# EAGLE board chipchestra-v04 (EAGLE 8.0.0)
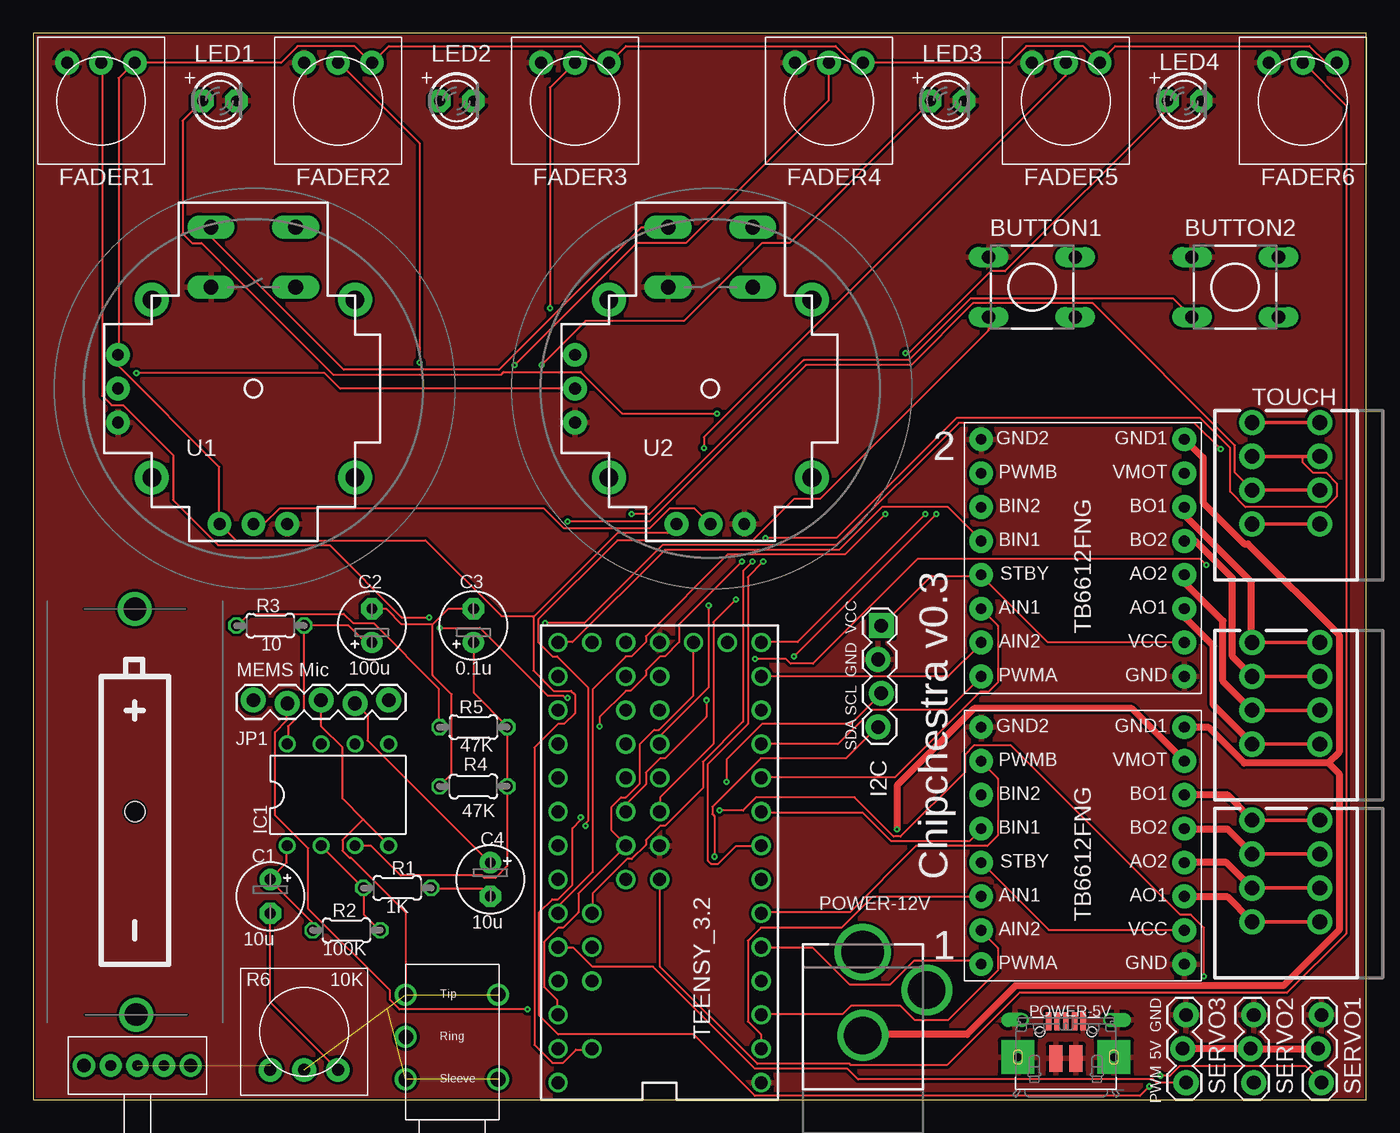
[diagram p0: board, top side]
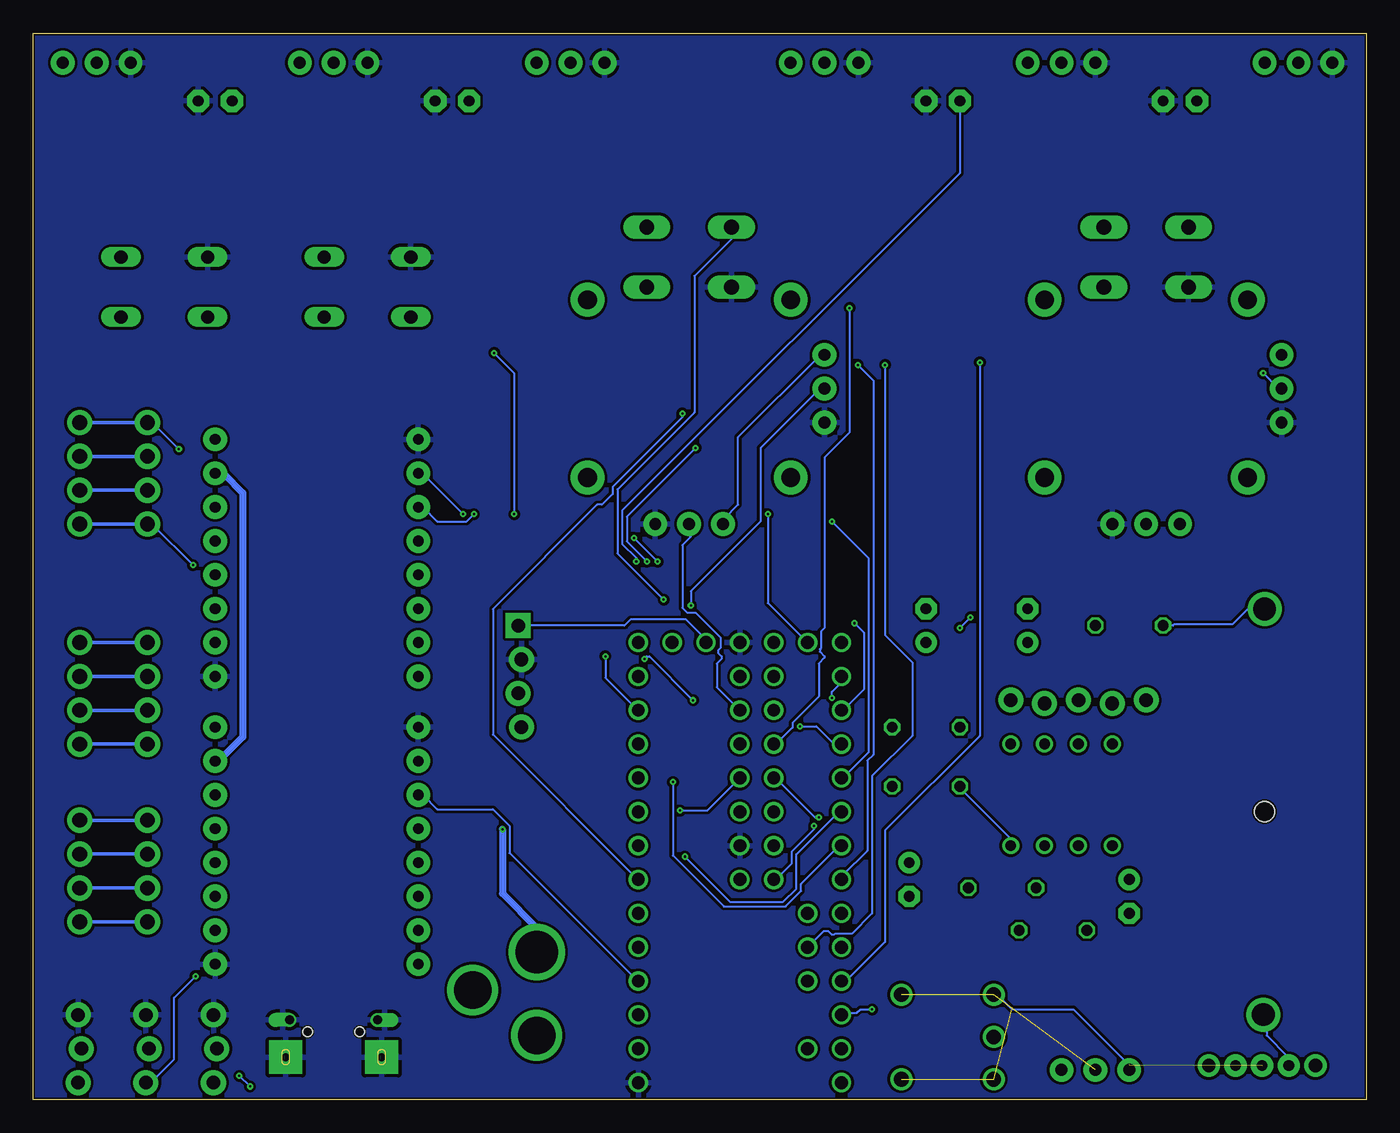
[diagram p1: board, bottom side, seen from below]

Size 100 x 80 mm. Coordinates in mm from the lower left corner, seen from the top.
Outline: 0,0 100,0 100,80 0,80 0,0
Copper layers (1*16): Top 0.035mm / dielectric 1.5mm / Bottom 0.035mm
Design rules "default *": minimum track width 6mil, minimum drill 6mil, track to track 8mil, track to pad 8mil, pad to pad 8mil, via to via 8mil, smd to smd 8mil, copper to edge 6mil, drill to drill 6mil, minimum pad ring 6mil, minimum via ring 6mil, stop-mask expansion 4mil, vias tented up to drill 0mil, thermal gap 10mil
Net classes: 0 default: width 0.152 mm, clearance 0.152 mm; 1 GND: width 0.508 mm, clearance 0.152 mm; 2 Power: width 0.508 mm, clearance 0.152 mm

## Footprints (pad centres in the part's own frame; a part is rotated, then mirrored left to right if it is on the bottom)
BATTERY-A23 = drill 1.702: GND@1 15.22,0.1; PWR@1 -15.22,0 | hole 1.524: 0,0
DTS-6 = drill 1 long: 1 -3.25,2.25; 2 3.25,2.25; 3 -3.25,-2.25; 4 3.25,-2.25
E2,5-5 = drill 0.813 pad 1.6: + -1.27,0 | drill 0.813 pad 1.6 octagon: - 1.27,0
TRIM-3386 = drill 0.9 pad 1.778: 1 -2.54,-2.857; 2 0,-2.857; 3 2.54,-2.857
1X04_LOCK = drill 1.016 pad 1.88 square: 1 0,0.127 | drill 1.016 pad 1.88: 2 2.54,-0.127; 3 5.08,0.127; 4 7.62,-0.127
DIL08 = drill 0.813 pad 1.27: 1 -3.81,-3.81; 2 -1.27,-3.81; 3 1.27,-3.81; 4 3.81,-3.81; 5 3.81,3.81; 6 1.27,3.81; 7 -1.27,3.81; 8 -3.81,3.81
1X05_LOCK = drill 1.016 pad 1.88: 1 0,0.127; 2 2.54,-0.127; 3 5.08,0.127; 4 7.62,-0.127; 5 10.16,0.127
LED3MM = drill 0.813 pad 1.676 octagon: A -1.27,0; K 1.27,0
SPRINGTERMINAL-2.54MM-4 = drill 1.1 pad 1.9: 1 7.62,-2.54; 2 5.08,-2.54; 3 2.54,-2.54; 4 0,-2.54; P$1 7.62,2.54; P$2 5.08,2.54; P$3 2.54,2.54; P$4 0,2.54
SPDT-SWITCH = drill 0.8 pad 1.676: 1 2,0; 2 4,0; 3 6,0 | drill 1 pad 1.676: P$1 0,0; P$2 8,0
4UCONN_20329 = smd 1 x 2: BASE@1 -0.75,-2; BASE@2 0.75,-2 | smd 0.4 x 1.35: D+ 0,0.775; D- -0.65,0.775; GND 1.3,0.775; ID 0.65,0.775; VBUS -1.3,0.775 | drill 0.7 offset: SPRT@1 -3.3,0.9; SPRT@2 3.3,0.9 | drill 0.6 pad 2.5 square: SPRT@3 -3.6,-1.9; SPRT@4 3.6,-1.9 | hole 0.7: -1.95,0; 1.95,0
DCJACK_2MM_PTH = drill 2.8: GND 0,7.35; GNDBREAK 4.8,10.75 | drill 3.2: PWR 0,13.6
0204/5 = drill 0.813 octagon: 1 -2.54,0; 2 2.54,0
1X03_LOCK = drill 1.016 pad 1.88: 1 0,0.127; 2 2.54,-0.127; 3 5.08,0.127
TEENSY_3.0-3.2_ALL_PINS_&_PADS = drill 0.965: 0 -7.62,13.97; 1 -7.62,11.43; 2 -7.62,8.89; 3 -7.62,6.35; 3.3V 7.62,11.43; 3.3V1 -2.54,-16.51; 3.3V2 2.54,-1.27; 4 -7.62,3.81; 5 -7.62,1.27; 6 -7.62,-1.27; 7 -7.62,-3.81; 8 -7.62,-6.35; 9 -7.62,-8.89; 10 -7.62,-11.43; 11 -7.62,-13.97; 12 -7.62,-16.51; 13 7.62,-16.51; 14/A0 7.62,-13.97; 15/A1 7.62,-11.43; 16/A2 7.62,-8.89; 17/A3 7.62,-6.35; 18/A4 7.62,-3.81; 19/A5 7.62,-1.27; 20/A6 7.62,1.27; 21/A7 7.62,3.81; 22/A8 7.62,6.35; 23/A9 7.62,8.89; 24 0,-3.81; 25 0,-6.35; 26 0,-8.89; 27 0,-11.43; 28 0,-13.97; 29 2.54,-13.97; 30 2.54,-11.43; 31 2.54,-8.89; 32 2.54,-6.35; 33 2.54,-3.81; A10 5.08,6.35; A11 5.08,3.81; A12 0,1.27; A13 2.54,1.27; AGND 7.62,13.97; AREF 5.08,8.89; GND -7.62,16.51; GND1 0,-16.51; GND2 0,-1.27; PGM 2.54,-16.51; RESET/DAC 5.08,-16.51; VBAT -5.08,-16.51; VIN 7.62,16.51; VUSB 5.08,13.97
1/8"-F-STEREO-PCB = drill 1.1: RING 5.461,0; SLEEVE1 8.636,6.934; SLEEVE2 8.636,0; TIP1 2.286,6.934; TIP2 2.286,0
JOYSTICK = drill 1.1 pad 1.778 long: B1A -3.175,12.12; B1B 3.175,12.12; B2A -3.175,7.62; B2B 3.175,7.62 | drill 0.889 pad 1.778: H1 -2.54,-10.16; H2 0,-10.16; H3 2.54,-10.16; V1 -10.16,2.54; V2 -10.16,0; V3 -10.16,-2.54 | drill 1.397 pad 2.54: MOUNT1 -7.62,6.668; MOUNT2 -7.62,-6.668; MOUNT3 7.62,-6.668; MOUNT4 7.62,6.668
POLOLU_TB6612FNG = drill 0.8 pad 1.778: AIN1 7.62,3.81; AIN2 7.62,6.35; AO1 -7.62,3.81; AO2 -7.62,1.27; BIN1 7.62,-1.27; BIN2 7.62,-3.81; BO1 -7.62,-3.81; BO2 -7.62,-1.27; GND -7.62,8.89; GND1 -7.62,-8.89; GND2 7.62,-8.89; PWMA 7.62,8.89; PWMB 7.62,-6.35; STBY 7.62,1.27; VCC -7.62,6.35; VMOT -7.62,-6.35

## Placement (x,y rotation side)
BAT1  [BATTERY-A23]  7.62,21.59 270 top
BUTTON1  DTS-6  [DTS-6]  74.93,60.96 0 top
BUTTON2  DTS-6  [DTS-6]  90.17,60.96 0 top
C1  10u  [E2,5-5]  17.78,15.24 270 top
C2  100u  [E2,5-5]  25.4,35.56 90 top
C3  0.1u  [E2,5-5]  33.02,35.56 90 top
C4  10u  [E2,5-5]  34.29,16.51 270 top
FADER1  [TRIM-3386]  5.08,74.93 180 top
FADER2  [TRIM-3386]  22.86,74.93 180 top
FADER3  [TRIM-3386]  40.64,74.93 180 top
FADER4  [TRIM-3386]  59.69,74.93 180 top
FADER5  [TRIM-3386]  77.47,74.93 180 top
FADER6  [TRIM-3386]  95.25,74.93 180 top
I2C  [1X04_LOCK]  63.5,35.56 270 top
IC1  OPA2134PA  [DIL08]  22.86,22.86 0 top
JP1  MEMS Mic  [1X05_LOCK]  16.51,29.84 0 top
LED1  [LED3MM]  13.97,74.93 0 top
LED2  [LED3MM]  31.75,74.93 0 top
LED3  [LED3MM]  68.58,74.93 0 top
LED4  [LED3MM]  86.36,74.93 0 top
MOTORS1  [SPRINGTERMINAL-2.54MM-4]  93.98,13.34 90 top
MOTORS2  [SPRINGTERMINAL-2.54MM-4]  93.98,26.67 90 top
ON/OFF  labl  [SPDT-SWITCH]  3.81,2.54 0 top
POWER-5V  [4UCONN_20329]  77.47,5.08 0 top
POWER-12V  [DCJACK_2MM_PTH]  62.23,-2.54 0 top
R1  1K  [0204/5]  27.3,15.88 180 top
R2  100K  [0204/5]  23.5,12.7 180 top
R3  10  [0204/5]  17.78,35.56 180 top
R4  47K  [0204/5]  33.02,23.5 0 top
R5  47K  [0204/5]  33.02,27.94 180 top
R6  10K  [TRIM-3386]  20.32,5.08 0 top
SERVO1  [1X03_LOCK]  96.52,6.35 270 top
SERVO2  [1X03_LOCK]  91.44,6.35 270 top
SERVO3  [1X03_LOCK]  86.36,6.35 270 top
TEENSY_3.2  TEENSY_3.1-3.2_ALL_PINS&PADS  [TEENSY_3.0-3.2_ALL_PINS_&_PADS]  46.99,17.78 180 top
TO-AUDIO-IO  1/8"-F-STEREO-PCB  [1/8"-F-STEREO-PCB]  27.94,10.16 270 top
TOUCH  [SPRINGTERMINAL-2.54MM-4]  93.98,43.18 90 top
U1  JOYSTICKPTH  [JOYSTICK]  16.51,53.34 0 top
U2  JOYSTICKPTH  [JOYSTICK]  50.8,53.34 0 top
U$6  POLOLU_TB6612FNG  [POLOLU_TB6612FNG]  78.74,40.64 180 top
U$7  POLOLU_TB6612FNG  [POLOLU_TB6612FNG]  78.74,19.05 180 top

## Library data of the parts
BAT1 ON/OFF = Daniel
BUTTON1 BUTTON2 = switch-tact
C1-C4 = rcl
FADER1-FADER6 LED1-LED4 POWER-12V R6 U1 U2 = adafruit
I2C = CMU-ArtFab; GND: GND; SCL: SCL; SDA: SDA; VCC: VCC
IC1 = linear; IC_NAME: TL072
JP1 = SparkFun-Connectors; CON1: Vin; CON2: 3V; CON3: GND; CON4: AC; CON5: DC
MOTORS1 MOTORS2 R1-R5 = CMU-ArtFab
POWER-5V = microbuilder
SERVO1 SERVO2 = SparkFun-Connectors
SERVO3 = SparkFun-Connectors; 5V: 5V; GND: GND; PWM: PWM
TEENSY_3.2 = Teensy_3_and_LC_Series_Boards_v1.4
TO-AUDIO-IO = CMU-ArtFab; TO-AUDIO-IO: TO-AUDIO-IO
TOUCH = CMU-ArtFab; TOUCH: TOUCH
U$6 = CMU-ArtFab; 2: 2
U$7 = CMU-ArtFab; 1: 1

## Nets
+3V3: I2C.1 JP1.2 TEENSY_3.2.3.3V TEENSY_3.2.3.3V1 TEENSY_3.2.3.3V2 U$6.STBY U$6.VCC
+5V: FADER1.1 FADER2.1 FADER3.1 FADER4.1 FADER5.1 FADER6.1 TEENSY_3.2.VUSB U1.H1 U1.V1 U2.H1 U2.V1
ANALOG1: FADER1.2 TEENSY_3.2.14/A0
ANALOG2: FADER2.2 TEENSY_3.2.23/A9
ANALOG3: FADER3.2 TEENSY_3.2.31
ANALOG4: FADER4.2 TEENSY_3.2.A10
ANALOG5: FADER5.2 TEENSY_3.2.A11
ANALOG6: FADER6.2 TEENSY_3.2.A12
BUTTON1: BUTTON1.3 TEENSY_3.2.A13
BUTTON2: BUTTON2.3 TEENSY_3.2.RESET/DAC
GND: BUTTON1.1 BUTTON2.1 FADER1.3 FADER2.3 FADER3.3 FADER4.3 FADER5.3 FADER6.3 I2C.2 LED1.K LED2.K LED3.K LED4.K POWER-5V.BASE@1 POWER-5V.BASE@2 POWER-5V.GND POWER-5V.SPRT@1 POWER-5V.SPRT@2 POWER-5V.SPRT@3 POWER-5V.SPRT@4 SERVO1.1 SERVO2.1 SERVO3.1 TEENSY_3.2.GND TEENSY_3.2.GND1 TEENSY_3.2.GND2 U1.B2A U1.H3 U1.V3 U2.B2A U2.H3 U2.V3 U$6.GND U$6.GND2 U$7.GND U$7.GND2
GND_MIC: C2.- C3.- IC1.4 JP1.3 ON/OFF.2 R4.1 R6.1 TO-AUDIO-IO.SLEEVE1 TO-AUDIO-IO.SLEEVE2
GND_MOT [Power]: POWER-12V.GND U$6.GND1 U$7.GND1
GNDBREAK: POWER-12V.GNDBREAK
I2C_SCL0: I2C.3 TEENSY_3.2.19/A5
I2C_SDA0: I2C.4 TEENSY_3.2.18/A4
JOYB1: TEENSY_3.2.24 U1.B1A U2.B1A
JOYB2: TEENSY_3.2.30
JOYH1: TEENSY_3.2.27 U1.H2 U2.H2
JOYH2: TEENSY_3.2.29
JOYV1: TEENSY_3.2.26 U1.V2 U2.V2
JOYV2: TEENSY_3.2.28
LED1: LED1.A TEENSY_3.2.5
LED2: LED2.A TEENSY_3.2.6
LED3: LED3.A TEENSY_3.2.20/A6
LED4: LED4.A TEENSY_3.2.21/A7
MOT_AIN1_1: TEENSY_3.2.0 U$7.AIN1
MOT_AIN1_2: TEENSY_3.2.8 U$6.AIN1
MOT_AIN2_1: TEENSY_3.2.1 U$7.AIN2
MOT_AIN2_2: TEENSY_3.2.11 U$6.AIN2
MOT_BIN1_1: TEENSY_3.2.7 U$7.BIN1
MOT_BIN1_2: TEENSY_3.2.13 U$6.BIN1
MOT_BIN2_1: TEENSY_3.2.2 U$7.BIN2
MOT_BIN2_2: TEENSY_3.2.12 U$6.BIN2
MOT_PWMA_1: TEENSY_3.2.3 U$7.PWMA
MOT_PWMA_2: TEENSY_3.2.9 U$6.PWMA
MOT_PWMB_1: TEENSY_3.2.4 U$7.PWMB
MOT_PWMB_2: TEENSY_3.2.10 U$6.PWMB
N$1: C2.+ IC1.8 R3.1
N$2: BAT1.GND@1 ON/OFF.1
N$3: C4.+ JP1.4
N$4: C4.- R1.1
N$5: IC1.2 R1.2 R2.1
N$6: C1.- R6.3
N$7: R6.2 TO-AUDIO-IO.TIP1 TO-AUDIO-IO.TIP2
N$8: C3.+ IC1.3 R4.2 R5.1
N$9: C1.+ IC1.1 R2.2
N$10: TEENSY_3.2.VBAT
N$12: U$7.STBY U$7.VCC
N$14 [Power]: POWER-5V.VBUS
N$45 [Power]: MOTORS1.P$1 U$7.BO1
N$46 [Power]: MOTORS1.P$2 U$7.BO2
N$48: TEENSY_3.2.VIN
N$52 [Power]: MOTORS1.P$3 U$7.AO2
N$53: TEENSY_3.2.PGM
N$54 [Power]: MOTORS1.P$4 U$7.AO1
N$55: TEENSY_3.2.AREF
N$56: TEENSY_3.2.AGND
N$57 [Power]: MOTORS2.P$1 U$6.BO1
N$63 [Power]: MOTORS2.P$2 U$6.BO2
N$64 [Power]: MOTORS2.P$3 U$6.AO2
N$65 [Power]: MOTORS2.P$4 U$6.AO1
SERVO1: SERVO3.3 TEENSY_3.2.22/A8
SERVO2: SERVO2.3 TEENSY_3.2.25
SERVO3: SERVO1.3 TEENSY_3.2.32
TOUCH1: TEENSY_3.2.15/A1 TOUCH.P$1
TOUCH2: TEENSY_3.2.16/A2 TOUCH.P$2
TOUCH3: TEENSY_3.2.17/A3 TOUCH.P$3
TOUCH4: TEENSY_3.2.33 TOUCH.P$4
VBAT [Power]: SERVO1.2 SERVO2.2 SERVO3.2
VMIC: BAT1.PWR@1 R3.2 R5.2
VMOT [Power]: POWER-12V.PWR U$6.VMOT U$7.VMOT

## Tracks (layer width: path | path; a pad name or v marks a point on that pad's centre or on a via)
+3V3  (via drill 0.15)
  Top 0.152: 71.12,39.29 67.39,39.29 63.65,35.56 I2C.1 | 71.12,39.29 76.1,34.31 86.32,34.31 U$6.VCC | 71.12,39.29 U$6.STBY | TEENSY_3.2.3.3V 39.29,6.4 39.29,7.47 38.32,8.45 38.32,11.82 39.38,12.89 39.74,12.89 40.89,14.05 40.89,15.47 44.45,19.02 TEENSY_3.2.3.3V2 44.45,19.11 43.38,20.18 43.38,21.96 44.09,22.67 44.45,22.67 45.52,23.74 45.52,26.67 46.58,27.74 46.94,27.74 49.52,30.32 49.52,34.23 TEENSY_3.2.3.3V1 | v37.07,6.76 27.47,6.76 26.76,7.47 26.76,8.18 20.62,14.31 20.62,18.85 18.14,21.34 18.14,27.56 19.02,28.45 19.02,29.69 JP1.2
  Bottom 0.152: v37.07,6.76 37.96,6.76 38.23,6.49 39.2,6.49 39.29,6.4 TEENSY_3.2.3.3V | I2C.1 55.65,35.56 55.21,36.01 51.03,36.01 49.61,34.58 49.61,34.31 TEENSY_3.2.3.3V1
+5V
  Top 0.152: 37.56,36.23 43.83,42.49 47.56,42.49 48.18,43.12 U2.H1 | 37.56,36.23 37.52,36.18 37.52,32.18 39.03,30.67 40.36,30.67 40.63,30.4 40.63,28.98 39.83,28.18 39.38,28.18 37.6,26.4 37.6,4.09 38.94,2.76 39.74,2.76 40.72,3.73 41.87,3.73 TEENSY_3.2.VUSB | FADER6.1 96.99,77.79 95.75,79.03 81.17,79.03 80.01,77.88 FADER5.1 78.77,79.03 74.5,79.03 73.25,77.79 FADER4.1 61.43,77.79 60.19,79.03 44.45,79.03 43.2,77.79 FADER3.1 42.32,77.79 41.07,79.03 26.67,79.03 25.43,77.79 FADER2.1 25.34,77.79 24.09,79.03 19.82,79.03 18.58,77.79 FADER1.1 7.56,77.79 6.4,76.63 6.4,55.92 U1.V1 6.4,55.83 6.4,55.03 13.96,47.47 13.96,43.2 U1.H1 14.05,43.12 15.2,41.96 29.43,41.96 35.12,36.27 37.52,36.27 37.56,36.23
  Bottom 0.152: U2.V1 40.72,55.83 40.98,55.83 47.12,49.7 47.12,44.63 48.18,43.56 48.18,43.2 U2.H1
ANALOG1  (via drill 0.15)
  Top 0.152: v40.09,30.14 39.92,30.14 39.74,30.32 38.58,30.32 33.52,35.38 v30.49,35.38 | v29.69,36.18 27.65,36.18 22.23,41.6 13.87,41.6 10.49,44.98 10.49,48.36 6.76,52.09 5.87,52.09 5.16,52.81 5.16,77.79 FADER1.2
  Bottom 0.152: v40.09,30.14 40.09,30.58 39.38,31.29 39.38,31.74 TEENSY_3.2.14/A0 | v29.69,36.18 v30.49,35.38
ANALOG2  (via drill 0.15)
  Top 0.152: v28.98,55.3 28.98,71.74 22.94,77.79 FADER2.2
  Bottom 0.152: TEENSY_3.2.23/A9 39.03,8.89 36.09,11.82 36.09,20.18 28.98,27.29 v28.98,55.3
ANALOG3  (via drill 0.15)
  Top 0.152: v38.76,59.38 38.76,75.92 40.63,77.79 FADER3.2
  Bottom 0.152: TEENSY_3.2.31 44.27,26.67 43.03,27.91 43.03,28.27 41.07,30.23 41.07,32.72 40.63,33.16 40.63,33.25 40.98,33.6 40.98,33.78 40.89,33.87 40.89,35.12 40.63,35.38 40.63,48.18 38.76,50.05 v38.76,59.38
ANALOG4  (via drill 0.15)
  Top 0.152: v36.09,55.12 45.25,64.28 48.98,64.28 59.65,74.94 59.65,77.79 FADER4.2
  Bottom 0.152: TEENSY_3.2.A10 40.72,12.62 40.36,12.62 40.09,12.36 39.92,12.36 39.83,12.45 38.58,12.45 37.07,13.96 37.07,24.27 34.05,27.29 34.05,32.8 36.09,34.85 v36.09,55.12
ANALOG5  (via drill 0.15)
  Top 0.152: v53.96,40.36 53.25,39.65 53.25,28.36 50.23,25.34 50.23,23.38 47.38,20.54 47.03,20.54 45.96,19.47 45.96,19.11 44.9,18.05 44.54,18.05 41.96,15.47 41.96,14.05 TEENSY_3.2.A11 | v50.32,48.9 50.32,49.7 77.43,76.81 77.43,77.79 FADER5.2
  Bottom 0.152: v53.96,40.36 55.47,41.87 55.47,43.74 v50.32,48.9
ANALOG6
  Top 0.152: TEENSY_3.2.A12 47.03,16.45 47.03,9.96 54.32,2.67 61.25,2.67 61.34,2.58 68.54,2.58 73.97,8 94.06,8 98.5,12.45 98.5,74.59 95.3,77.79 FADER6.2
BUTTON1  (via drill 0.15)
  Top 0.152: v41.43,20.54 41.43,20.71 41.6,20.89 41.6,30.94 39.29,33.25 38.94,33.25 37.87,34.31 37.87,36.01 43.83,41.96 53.96,41.96 57.07,45.07 59.03,45.07 71.65,57.7 71.65,58.67 BUTTON1.3
  Bottom 0.152: v41.43,20.54 41.43,20.27 43.12,18.58 43.12,17.69 44.27,16.54 44.45,16.54 TEENSY_3.2.A13
BUTTON2  (via drill 0.15)
  Top 0.152: v44.9,43.92 46.23,43.92 57.78,55.47 65.7,55.47 70.32,60.1 85.52,60.1 86.86,58.76 BUTTON2.3
  Bottom 0.152: v44.9,43.92 44.9,37.25 41.96,34.31 TEENSY_3.2.RESET/DAC
GND
  pour Bottom: 0,0 100.33,0 100.33,80.01 0,80.01
  pour Top: 0,0 100.33,0 100.33,80.01 0,80.01
GND_MIC  (4 unrouted)
  Top 0.152: 29.96,35.65 27.65,35.65 26.49,36.8 25.43,36.8 C2.- | 29.96,35.65 31.11,36.8 32.98,36.8 C3.- | 24.76,21.02 26.67,19.11 IC1.4 | 24.76,21.02 23.2,22.58 23.2,26.4 21.6,28 21.6,29.96 JP1.3 | 29.96,35.65 29.96,31.83 31.38,30.4 31.38,24.45 30.49,23.56 R4.1 | 27.91,7.91 27.91,14.05 23.82,18.14 23.74,18.14 23.2,18.67 23.2,19.47 24.76,21.02
  Bottom 0.152: R6.1 17.78,2.58 21.96,6.76 26.58,6.76 27.65,7.82 27.91,7.82 | IC1.4 26.67,19.56 30.4,23.29 30.4,23.47 R4.1
GND_MOT
  Top 0.508: 97.17,25.25 90.86,25.25 88.19,27.91 86.41,27.91 U$7.GND1 | 97.17,25.25 97.97,26.05 97.97,34.85 91.12,41.69 90.86,41.69 87.74,44.81 87.74,48.18 86.41,49.52 U$6.GND1 | 97.17,25.25 97.97,24.45 97.97,12.71 93.79,8.53 73.7,8.53 70.05,4.89 62.23,4.89 POWER-12V.GND
I2C_SCL0  (via drill 0.15)
  Top 0.152: v52.01,23.82 52.01,25.51 54.67,28.18 61.34,28.18 63.56,30.4 I2C.3
  Bottom 0.152: v52.01,23.82 52.01,18.31 48.18,14.49 43.56,14.49 42.41,15.65 42.41,16.18 39.56,19.02 39.38,19.02 TEENSY_3.2.19/A5
I2C_SDA0  (via drill 0.15)
  Top 0.152: v51.12,18.22 51.12,21.25 50.94,21.43 50.94,21.96 54.59,25.6 60.98,25.6 63.3,27.91 I2C.4
  Bottom 0.152: v51.12,18.22 47.74,14.85 43.74,14.85 42.76,15.82 42.76,18.4 39.65,21.51 39.38,21.51 TEENSY_3.2.18/A4
JOYB1  (via drill 0.15)
  Top 0.152: v52.72,37.52 51.03,35.83 51.03,26.67 47.03,22.67 47.03,21.6 TEENSY_3.2.24 | U1.B1A 13.34,64.72 23.29,54.76 34.94,54.76 45.61,65.43 47.56,65.43 U2.B1A
  Bottom 0.152: v52.72,37.52 56.19,40.98 56.19,45.78 50.41,51.56 50.41,61.78 47.56,64.63 47.56,65.43 U2.B1A
JOYH1
  Top 0.152: U1.H2 16.54,43.2 17.34,43.2 18.49,44.36 38.32,44.36 39.83,42.85 46.23,42.85 47.74,44.36 49.61,44.36 50.76,43.2 U2.H2
  Bottom 0.152: TEENSY_3.2.27 48.72,30.94 48.72,32.72 48.36,33.07 48.36,33.25 48.63,33.52 48.63,33.69 48.45,33.87 48.45,34.67 50.32,36.54 50.94,36.54 51.3,36.89 51.3,41.6 50.67,42.23 50.76,42.32 50.76,43.12 U2.H2
JOYV1  (via drill 0.15)
  Top 0.152: v50.67,37.07 50.67,30.94 47.03,27.29 47.03,26.67 TEENSY_3.2.26 | v7.73,54.5 21.87,54.5 23.02,53.34 U2.V2
  Bottom 0.152: v50.67,37.07 50.67,38.14 45.43,43.38 45.43,48.9 40.98,53.34 U2.V2 | U1.V2 6.58,53.34 v7.73,54.5
LED1  (via drill 0.15)
  Top 0.152: v51.3,51.47 44.18,51.47 41.07,54.59 35.29,54.59 35.12,54.41 22.49,54.41 12.62,64.28 11.91,64.28 11.2,64.99 11.2,73.43 LED1.A
  Bottom 0.152: v51.3,51.47 51.3,51.21 56.54,45.96 56.54,45.43 57.34,44.63 57.7,44.63 65.52,36.8 65.52,27.38 54.67,16.54 TEENSY_3.2.5
LED2  (via drill 0.15)
  Top 0.152: v54.76,40.36 53.61,39.2 53.61,28.18 50.58,25.16 50.58,17.96 50.85,17.69 51.38,17.69 52.72,19.02 54.59,19.02 TEENSY_3.2.6
  Bottom 0.152: v54.76,40.36 54.76,40.63 55.83,41.69 55.83,44.18 30.49,69.52 30.49,74.85 LED2.A
LED3  (via drill 0.15)
  Top 0.152: v38.14,55.12 41.43,58.41 48.81,58.41 54.67,64.28 56.72,64.28 67.3,74.85 LED3.A
  Bottom 0.152: v38.14,55.12 36.98,53.96 36.98,25.87 37.43,25.43 37.43,18.67 39.29,16.8 39.29,16.54 TEENSY_3.2.20/A6
LED4  (via drill 0.15)
  Top 0.152: v63.92,43.92 60.9,40.89 52.09,40.89 45.96,34.76 45.96,34.31 44.9,33.25 44.45,33.25 41.96,30.76 41.96,17.07 39.38,14.49 39.38,14.05 TEENSY_3.2.21/A7 | v65.43,56.01 65.7,56.01 71.83,62.14 72.9,62.14 85.08,74.32 85.08,74.85 LED4.A
  Bottom 0.152: v63.92,43.92 63.92,54.5 v65.43,56.01
MOT_AIN1_1
  Top 0.152: TEENSY_3.2.0 54.59,3.82 54.59,4.89 53.61,5.87 53.61,11.91 54.59,12.89 60.63,12.89 62.94,15.2 71.12,15.2 U$7.AIN1
MOT_AIN1_2
  Top 0.152: TEENSY_3.2.8 54.67,24.18 64.63,24.18 71.03,30.58 71.65,30.58 72.36,31.29 72.36,35.56 71.12,36.8 U$6.AIN1
MOT_AIN2_1
  Top 0.152: TEENSY_3.2.1 54.67,6.4 60.72,6.4 61.34,7.02 65.08,7.02 66.14,5.96 68.63,5.96 72.36,9.69 72.36,11.38 71.12,12.62 U$7.AIN2
MOT_AIN2_2
  Top 0.152: TEENSY_3.2.11 54.67,31.74 68.63,31.74 71.12,34.23 U$6.AIN2
MOT_BIN1_1
  Top 0.152: TEENSY_3.2.7 54.67,21.51 62.23,21.51 64.36,19.38 70.23,19.38 71.12,20.27 U$7.BIN1
MOT_BIN1_2
  Top 0.152: TEENSY_3.2.13 39.38,34.31 40.45,34.31 47.38,41.25 60.45,41.25 63.65,44.45 68.63,44.45 71.12,41.96 U$6.BIN1
MOT_BIN2_1
  Bottom 0.152: TEENSY_3.2.2 54.67,8.89 64.28,18.49 64.28,20.54 65.52,21.78 69.7,21.78 70.76,22.85 71.12,22.85 U$7.BIN2
MOT_BIN2_2  (via drill 0.15)
  Top 0.152: v66.94,43.92 57.34,34.31 54.67,34.31 TEENSY_3.2.12
  Bottom 0.152: v66.94,43.92 67.47,43.38 69.7,43.38 70.76,44.45 U$6.BIN2
MOT_PWMA_1
  Top 0.152: TEENSY_3.2.3 54.67,11.38 58.5,11.38 61.25,8.62 64.28,8.62 66.05,10.4 70.94,10.4 71.12,10.22 U$7.PWMA
MOT_PWMA_2
  Top 0.152: TEENSY_3.2.9 60.36,26.67 62.94,29.25 68.63,29.25 71.12,31.74 U$6.PWMA
MOT_PWMB_1
  Top 0.152: TEENSY_3.2.4 54.67,14.05 61.25,14.05 66.23,19.02 71.56,19.02 72.36,19.82 72.36,24.09 71.12,25.34 U$7.PWMB
MOT_PWMB_2  (via drill 0.15)
  Top 0.152: v67.74,43.92 v57.07,33.25
  Bottom 0.152: v57.07,33.25 57.07,31.65 54.67,29.25 TEENSY_3.2.10 | v67.74,43.92 70.76,46.94 71.12,46.94 U$6.PWMB
N$1
  Top 0.152: C2.+ 25.34,34.31 24.89,34.31 23.65,35.56 R3.1 20.27,35.56 20.27,29.16 19.11,28 19.11,26.67 IC1.8
N$2
  Bottom 0.152: ON/OFF.1 5.87,2.58 5.87,3.2 7.47,4.8 7.47,5.07 7.64,5.25 7.64,6.31 BAT1.GND@1
N$3
  Top 0.152: C4.+ 34.23,17.78 25.07,26.94 25.07,28.8 24.18,29.69 JP1.4
N$4
  Top 0.152: R1.1 29.87,15.82 33.69,15.82 34.23,15.29 C4.-
N$5
  Top 0.152: R2.1 25.96,12.71 24.8,13.87 24.8,15.82 R1.2 24.71,15.91 21.6,19.02 IC1.2
N$6
  Top 0.152: C1.- 17.78,7.29 22.85,2.22 R6.3
N$7  (2 unrouted)
N$8
  Top 0.152: IC1.3 24.18,19.02 25.34,19.02 27.56,16.8 33.69,16.8 33.87,16.62 34.67,16.62 35.56,17.51 R4.2 R5.1 35.56,28 33.07,30.49 33.07,34.23 C3.+
N$9
  Top 0.152: R2.2 20.89,12.71 20.89,13.34 17.78,16.45 C1.+ 17.78,16.54 19.02,17.78 19.02,19.02 IC1.1
N$12
  Top 0.152: U$7.STBY 76.19,12.71 86.32,12.71 U$7.VCC
N$45
  Top 0.508: U$7.BO1 86.41,22.85 89.61,22.85 91.39,21.07 MOTORS1.P$1
N$46
  Top 0.508: U$7.BO2 86.41,20.27 89.61,20.27 91.39,18.49 MOTORS1.P$2
N$52
  Top 0.508: U$7.AO2 89.52,17.78 91.39,15.91 MOTORS1.P$3
N$54
  Top 0.508: U$7.AO1 86.41,15.2 89.61,15.2 91.39,13.42 MOTORS1.P$4
N$57
  Top 0.508: U$6.BO1 86.41,44.45 86.41,43.83 91.39,38.85 91.39,34.4 MOTORS2.P$1
N$63
  Top 0.508: U$6.BO2 86.41,41.87 87.21,41.87 89.97,39.12 89.97,33.25 91.39,31.83 MOTORS2.P$2
N$64
  Top 0.508: U$6.AO2 86.41,39.29 86.41,38.76 89.26,35.92 89.26,31.38 91.39,29.25 MOTORS2.P$3
N$65
  Top 0.508: U$6.AO1 86.41,36.8 86.41,36.18 88.54,34.05 88.54,29.6 91.39,26.76 MOTORS2.P$4
SERVO1
  Top 0.152: TEENSY_3.2.22/A8 39.38,11.38 40.54,11.38 41.96,9.96 46.49,9.96 54.14,2.31 61.07,2.31 61.87,1.51 84.01,1.51 84.28,1.25 86.41,1.25 SERVO3.3
SERVO2  (via drill 0.15)
  Top 0.152: v51.47,21.69 53.25,21.69 54.23,22.67 61.61,22.67 64.54,19.74 65.08,19.74 69.88,24.54 69.88,25.87 70.59,26.58 73.34,26.58 86.06,13.87 86.86,13.87 87.83,12.89 v87.83,9.25
  Bottom 0.152: TEENSY_3.2.25 49.43,21.69 v51.47,21.69 | v87.83,9.25 89.43,7.64 89.43,3.02 91.12,1.33 91.57,1.33 SERVO2.3
SERVO3  (via drill 0.15)
  Top 0.152: v41.07,21.16 41.07,20.98 40.45,20.36 40.45,16.09 39.38,15.02 38.94,15.02 37.96,14.05 37.96,6.31 39.38,4.89 49.52,4.89 54.14,0.27 83.03,0.27 v83.74,0.98 | v84.54,1.78 85.25,1.78 85.97,2.49 95.48,2.49 96.63,1.33 SERVO1.3
  Bottom 0.152: v41.07,21.16 41.34,21.16 44.27,24.09 44.45,24.09 TEENSY_3.2.32 | v84.54,1.78 v83.74,0.98
TOUCH1  (via drill 0.15)
  Top 0.152: v38.41,35.74 41.34,35.74 47.21,41.6 60.27,41.6 69.43,50.76 87.12,50.76 v89.08,48.81
  Bottom 0.152: v38.41,35.74 37.69,35.03 37.69,30.76 38.85,29.6 38.94,29.6 39.29,29.25 TEENSY_3.2.15/A1 | v89.08,48.81 91.03,50.76 91.39,50.76 TOUCH.P$1
TOUCH2  (via drill 0.15)
  Top 0.152: v42.49,28 42.49,28.71 44.45,30.67 44.81,30.67 45.96,31.83 45.96,32.18 47.03,33.25 47.38,33.25 48.45,34.31 48.45,35.65 v53.16,40.36 | v54.94,42.14 60.27,42.14 69.25,51.12 87.57,51.12 89.79,48.9 89.79,45.61 90.94,44.45 96.99,44.45 97.79,45.25 97.79,46.23 96.99,47.03 96.01,47.03 95.21,47.83 95.21,48.18 TOUCH.P$2
  Bottom 0.152: TEENSY_3.2.16/A2 39.92,26.67 41.25,28 v42.49,28 | v54.94,42.14 v53.16,40.36
TOUCH3  (via drill 0.15)
  Top 0.152: v40.09,43.38 46.23,43.38 57.96,55.12 65.88,55.12 70.5,59.74 79.48,59.74 90.14,49.07 90.14,47.03 91.39,45.78 TOUCH.P$3
  Bottom 0.152: v40.09,43.38 37.34,40.63 37.34,26.05 38.85,24.54 38.94,24.54 39.29,24.18 TEENSY_3.2.17/A3
TOUCH4  (via drill 0.15)
  Top 0.152: TEENSY_3.2.33 44.45,22.14 45.96,23.65 45.96,24.54 47.03,25.6 47.38,25.6 50.49,28.71 v50.49,29.96 | v54.14,33.07 56.45,33.07 56.81,32.72 58.5,32.72 66.32,40.54 87.57,40.54 v88.01,40.09
  Bottom 0.152: v50.49,29.96 53.78,33.25 53.96,33.25 v54.14,33.07 | v88.01,40.09 91.03,43.12 91.39,43.12 TOUCH.P$4
VBAT
  Top 0.508: SERVO3.2 86.23,3.82 91.3,3.82 SERVO2.2 91.48,3.82 96.37,3.82 SERVO1.2
VMIC
  Top 0.152: R5.2 30.4,28 30.4,30.85 25.51,35.74 24,35.74 23.29,36.45 16.18,36.45 15.29,35.56 R3.2
  Bottom 0.152: R3.2 14.49,35.56 14.4,35.65 10.05,35.65 8.89,36.8 7.64,36.8 BAT1.PWR@1
VMOT  (via drill 0.15)
  Top 0.508: v64.81,20.27 64.81,23.56 70.59,29.34 82.41,29.34 86.32,25.43 U$7.VMOT
  Bottom 0.508: U$7.VMOT 86.32,25.43 86.06,25.43 84.28,27.2 84.28,45.52 85.7,46.94 86.32,46.94 U$6.VMOT | POWER-12V.PWR 62.23,12.89 64.81,15.47 v64.81,20.27

## Text on the board
tNames: Chipchestra v0.3